# Allegro board PT8620_LTC_patch.brd
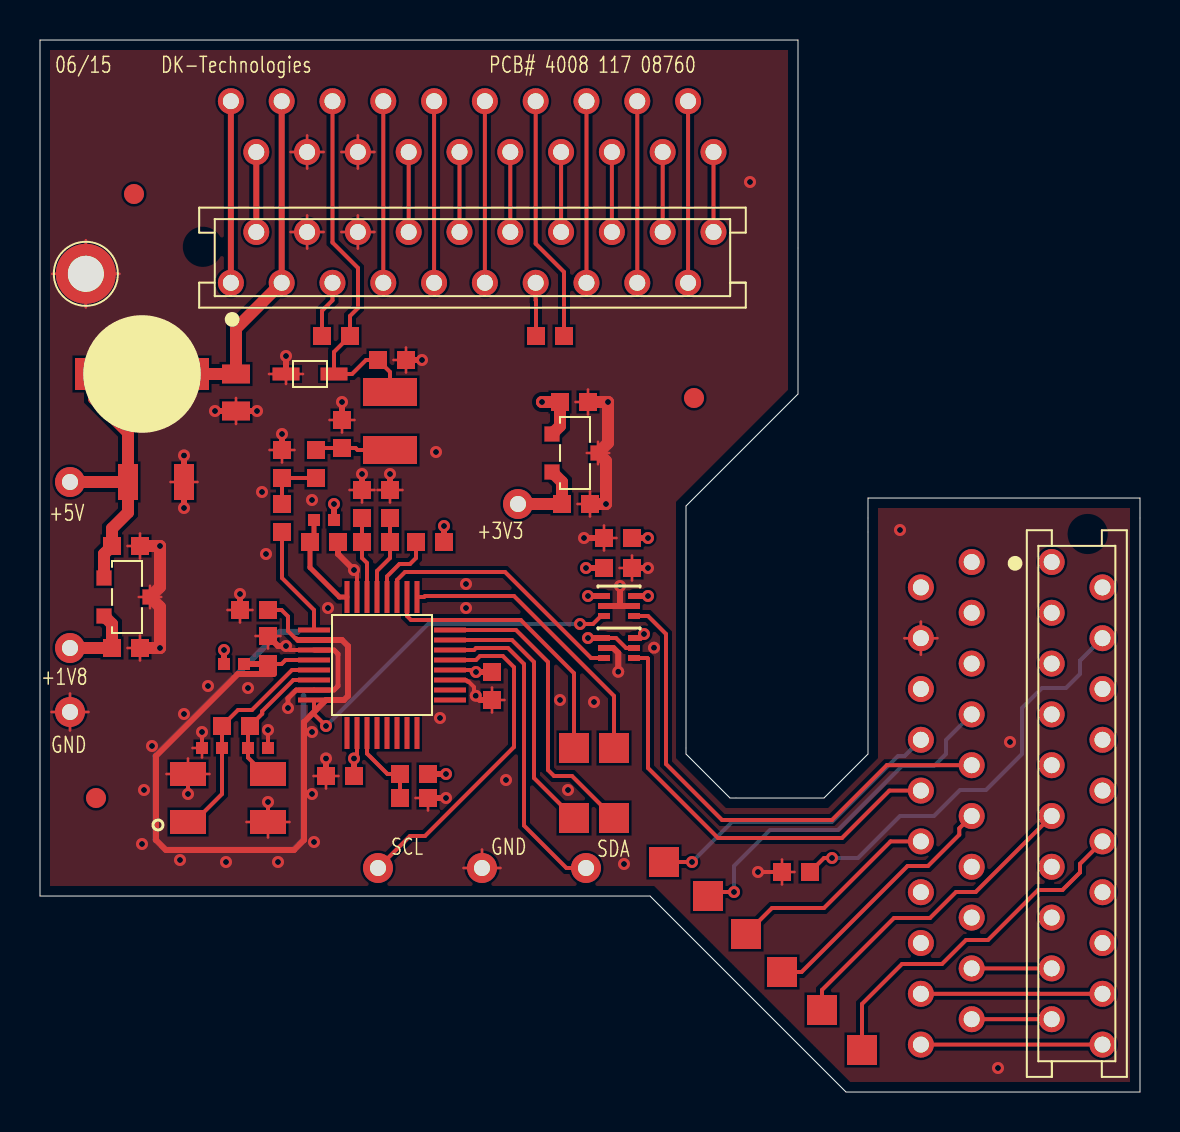
[diagram p0: board, top side]
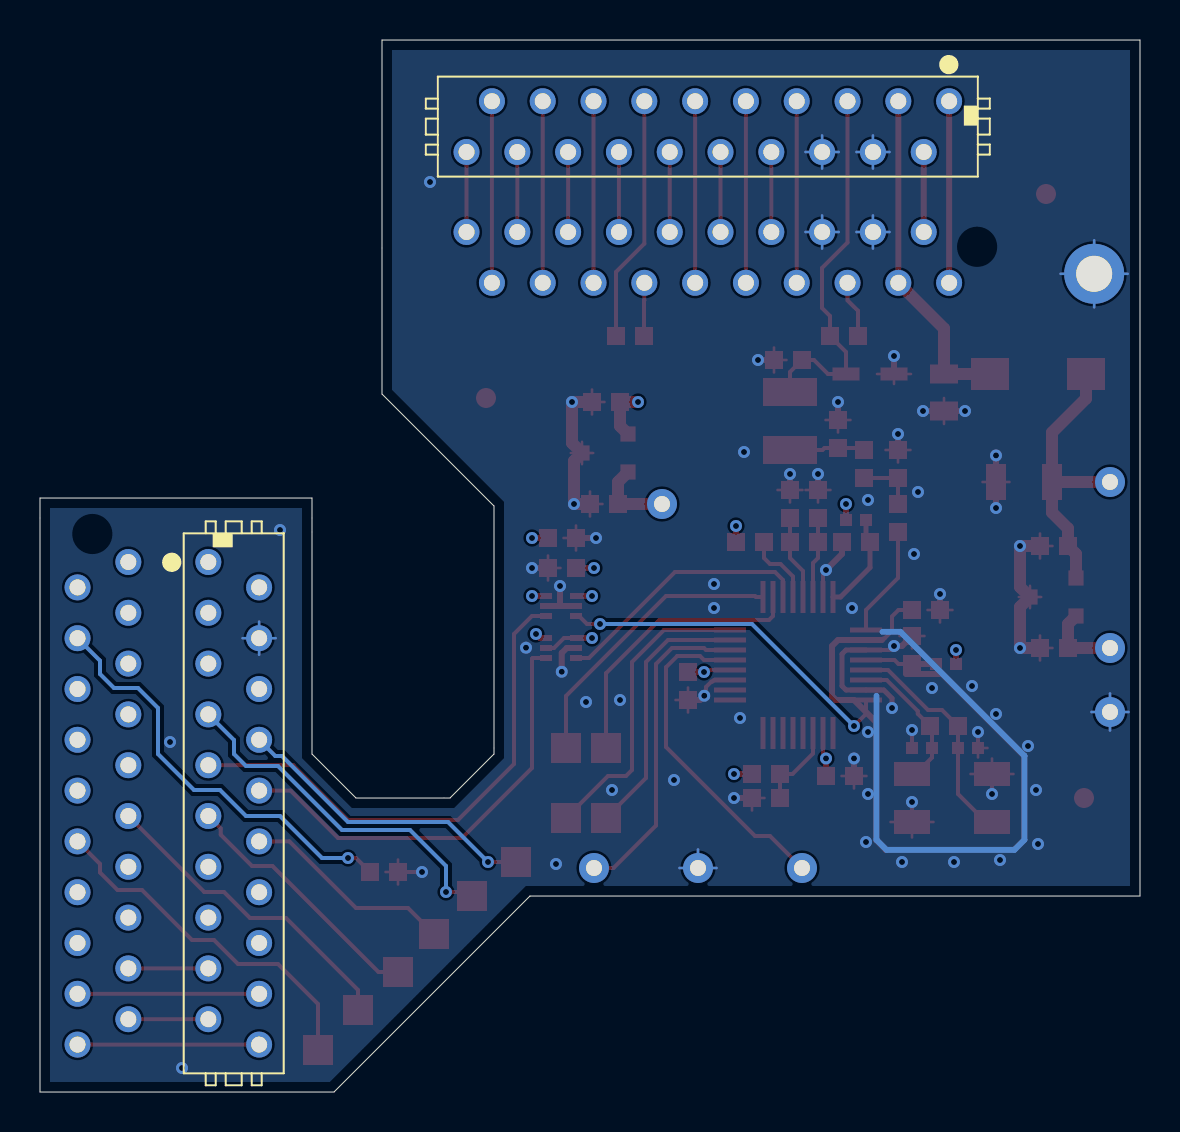
[diagram p1: board, bottom side, seen from below]

Outline 55 x 52.6 mm; copper layers: TOP, LAYER2, LAYER3, BOTTOM. Coordinates in mm from the lower left corner of the outline.
Outline path: 0,52.6 37.9,52.6 37.9,34.9 32.3,29.3 32.3,16.9 34.5,14.7 39.2,14.7 41.4,16.9 41.4,29.7 55,29.7 55,0 40.3,0 30.5,9.8 0,9.8 0,52.6

## Placement (name value [footprint] x y rotation side)
C1  1uF  [CC0603]  26.7 34.5 0 top
C2  1uF  [CC0603]  26.8 29.4 0 top
C3  1uF  [CC0603]  4.3 27.3 0 top
C4  1uF  [CC0603]  4.3 22.2 0 top
C5  10uF/25V  [CC1206]  5.8 30.5 0 top
C6  100nF  [CC0805]  9.8 34.98 270 top
C7  1uF  [CC0603]  16.1 29.4 270 top
C8  1uF  [CC0603]  17.5 29.4 270 top
C9  1uF  [CC0603]  16.8 27.5 0 top
C10  100nF  [CC0603]  12.1 28.7 270 top
C11  180pF  [CC0603]  17.6 36.6 0 top
C12  180pF  [CC0603]  15.1 32.9 90 top
C13  100nF  [CC0603]  10.7 24.1 0 top
C14  12pF  [CC0402]  8.6 17.2 180 top
C15  12pF  [CC0402]  10.9 17.2 0 top
C16  100nF  [CC0603]  11.4 22.1 90 top
C17  100nF  [CC0603]  14.2 27.5 0 top
C18  100nF  [CC0603]  22.6 20.3 270 top
C19  100nF  [CC0603]  15 15.8 180 top
C20  100nF  [CC0603]  28.9 26.2 0 top
C21  100nF  [CC0603]  28.9 27.7 180 top
D1  5V, TVS  [SOD323_TVS]  13.5 35.9 0 top
FID1  1mm  [FIDUCIAL1_3]  4.7 44.9 0 top
FID2  1mm  [FIDUCIAL1_3]  32.7 34.7 0 top
FID3  1mm  [FIDUCIAL1_3]  2.8 14.7 0 top
J1  TE_9-215464-0  [TE_215464]  21.61 48.27 180 bottom
J2  TE_9-215079-0  [TE_215079]  21.61 41.73 180 top
J3  TE_9-215464-0  [TE_215464]  45.31 14.44 90 bottom
J4  pad1.5x1.5mm  [PAD150X150]  34.9 9.8 0 top
J5  pad1.5x1.5mm  [PAD150X150]  32.7 11.5 0 top
J6  pad1.5x1.5mm  [PAD150X150]  38.6 6 0 top
J7  pad1.5x1.5mm  [PAD150X150]  36.8 7.9 0 top
J8  pad1.5x1.5mm  [PAD150X150]  28.2 17.2 0 top
J9  pad1.5x1.5mm  [PAD150X150]  30.2 17.2 0 top
J10  pad1.5x1.5mm  [PAD150X150]  30.2 13.7 0 top
J17  TE_9-215079-0  [TE_215079]  51.85 14.44 90 top
J18  pad1.5x1.5mm  [PAD150X150]  28.2 13.7 0 top
J19  pad1.5x1.5mm  [PAD150X150]  40.6 4.1 0 top
J20  pad1.5x1.5mm  [PAD150X150]  42.6 2.1 0 top
L1  2.7uH, 2.15A  [LQH55P_2220]  5.1 35.9 0 top
L2  2.7uH/0.29A  [CL1210]  17.5 33.55 270 top
L3  40R@100Mhz_0402  [CR0402]  14.2 28.6 180 top
L4  40R@100Mhz_0402  [CR0402]  9.7 21.4 0 top
PAD1  hole30p18  [HOLE30P18]  4.79 40.91 0 top
R1  N.M.  [CR0603]  14.8 37.8 0 top
R2  N.M.  [CR0603]  25.5 37.8 0 top
R3  0R  [CR0603]  19.5 27.5 0 top
R4  37R4_1pct  [CR0603]  13.8 31.4 270 top
R5  37R4_1pct  [CR0603]  12.1 31.4 270 top
R6  0R  [CR0603]  37.8 11 0 top
R7  100K_1pct  [CR0603]  9.8 18.3 0 top
R8  N.M.  [CR0603]  18.7 15.9 0 top
R9  10K0_1pct  [CR0603]  18.7 14.7 0 top
TP1  +5V  [TESTPOINT_PL080C150]  1.5 30.5 0 top
TP2  +3V3  [TESTPOINT_PL080C150]  23.9 29.4 0 top
TP3  +1V8  [TESTPOINT_PL080C150]  1.5 22.2 0 top
TP4  GND  [TESTPOINT_PL080C150]  1.5 19 0 top
TP5  GND  [TESTPOINT_PL080C150]  22.1 11.2 0 top
TP6  SCL  [TESTPOINT_PL080C150]  16.9 11.2 0 top
TP7  SDA  [TESTPOINT_PL080C150]  27.3 11.2 0 top
U1  AP7333, 3.3V  [SOT-23-123]  25.6 32.9 270 top
U2  AP7333, 1.8V  [SOT-23-123]  3.2 25.7 270 top
U3  SN74LVC1T45DRLR  [SOT533-6_DRL]  28.95 24.3 270 top
U4  SN74LVC1T45DRLR  [SOT533-6_DRL]  28.95 22.2 270 top
U5  TVP5150  [TQFP32_P050_700X700]  17.1 21.35 0 top
X1  QC5A14.31818F12B12  [XTAL_SMD4_P400_500X320]  9.4 14.7 0 top

## Library data of the parts
C1-C21 = KOND
D1 = TVS
FID1-FID3 = FID
J1-J3 J17 = CON20
J4-J10 J18-J20 = CON1_0: room: AESIN2
L1 = INDUCTOR
L2 = SPOLE
L3 L4 = RF_IND_1: room: ANALOG_AUDIO
PAD1 = PAD
R1-R9 = RES
TP1-TP7 = TEST POINT: room: POWER_3V3
U1 U2 = AP7333
U3 U4 = 74LVC1T45
U5 = TVP5150
X1 = XTAL_4S

## Footprints (pads in the part's own frame, mm; a bottom-side part is the same pattern mirrored in y, then rotated)
CC0402
  rect 0.6x0.6 smd: 1(-0.5,0) 2(0.5,0)
CC0603
  rect 0.9x0.9 smd: 1(-0.7,0) 2(0.7,0)
CC0805
  rect 0.95x1.4 smd: 1(-0.925,0) 2(0.925,0)
CC1206
  rect 1x1.8 smd: 1(-1.4,0) 2(1.4,0)
CL1210
  rect 1.4x2.7 smd: 1(-1.45,0) 2(1.45,0)
CR0402
  rect 0.6x0.6 smd: 1(-0.5,0) 2(0.5,0)
CR0603
  rect 0.9x0.9 smd: 1(-0.7,0) 2(0.7,0)
FIDUCIAL1_3
  round 1 smd: 1(0,0)
HOLE30P18
  round 3 hole 1.8: 1(-2.5,0)
LQH55P_2220
  rect 1.9x1.6 smd: 1(-2.4,0) 2(2.4,0)
PAD150X150
  rect 1.5x1.5 smd: 1(-1.5,0)
SOD323_TVS
  rect 1.35x0.65 smd: 1(-1.2,0) 2(1.2,0)
SOT533-6_DRL
  rect 0.3x0.6 smd: 1(-0.5,-0.75) 2(0,-0.75) 3(0.5,-0.75) 4(0.5,0.75) 5(0,0.75) 6(-0.5,0.75)
SOT-23-123
  rect 0.76x0.76 smd: 1(0,0) 2(1.9,0) 3(0.95,2.3)
TE_215079
  round 0 hole 1.6 unplated: (13.465,-0.53)
  round 1.3 hole 0.8: 1(12.065,1.27) 2(10.795,-1.27) 3(9.525,1.27) 4(8.255,-1.27) 5(6.985,1.27) 6(5.715,-1.27) 7(4.445,1.27) 8(3.175,-1.27) 9(1.905,1.27) 10(0.635,-1.27) 11(-0.635,1.27) 12(-1.905,-1.27) 13(-3.175,1.27) 14(-4.445,-1.27) 15(-5.715,1.27) 16(-6.985,-1.27) 17(-8.255,1.27) 18(-9.525,-1.27) 19(-10.795,1.27) 20(-12.065,-1.27)
TE_215464
  round 1.3 hole 0.8: 1(12.065,1.27) 2(10.795,-1.27) 3(9.525,1.27) 4(8.255,-1.27) 5(6.985,1.27) 6(5.715,-1.27) 7(4.445,1.27) 8(3.175,-1.27) 9(1.905,1.27) 10(0.635,-1.27) 11(-0.635,1.27) 12(-1.905,-1.27) 13(-3.175,1.27) 14(-4.445,-1.27) 15(-5.715,1.27) 16(-6.985,-1.27) 17(-8.255,1.27) 18(-9.525,-1.27) 19(-10.795,1.27) 20(-12.065,-1.27)
TESTPOINT_PL080C150
  round 1.5 hole 0.8: 1(0,0)
TQFP32_P050_700X700
  rect 1.6x0.25 smd: 1(-3.4,1.75) 2(-3.4,1.25) 3(-3.4,0.75) 4(-3.4,0.25) 5(-3.4,-0.25) 6(-3.4,-0.75) 7(-3.4,-1.25) 8(-3.4,-1.75) 17(3.4,-1.75) 18(3.4,-1.25) 19(3.4,-0.75) 20(3.4,-0.25) 21(3.4,0.25) 22(3.4,0.75) 23(3.4,1.25) 24(3.4,1.75)
  rect 0.25x1.6 smd: 9(-1.75,-3.4) 10(-1.25,-3.4) 11(-0.75,-3.4) 12(-0.25,-3.4) 13(0.25,-3.4) 14(0.75,-3.4) 15(1.25,-3.4) 16(1.75,-3.4) 25(1.75,3.4) 26(1.25,3.4) 27(0.75,3.4) 28(0.25,3.4) 29(-0.25,3.4) 30(-0.75,3.4) 31(-1.25,3.4) 32(-1.75,3.4)
XTAL_SMD4_P400_500X320
  rect 1.8x1.2 smd: 1(-2,-1.2) 2(2,-1.2) 3(2,1.2) 4(-2,1.2)

## Nets
+1V8: C4.1 L3.1 L4.1 TP3.1 U2.2(VO)
+3V3: C2.1 C18.1 C19.1 C20.1 R3.2 R8.2 TP2.1 U1.2(VO) U3.1(VCCA) U4.1(VCCA) U4.5(DIR) U5.10(IO_DVDD) U5.20(DVDD)
+5V: C1.1 C3.1 C5.1 C21.1 L1.1 TP1.1 U1.1(VI) U2.1(VI) U3.6(VCCB) U4.6(VCCB)
GND: C1.2 C2.2 C3.2 C4.2 C5.2 C6.2 C7.1 C8.1 C11.2 C12.2 C13.1 C14.2 C15.2 C16.2 C17.2 C18.2 C19.2 C20.2 C21.2 D1.1 J1.4 J1.6 J2.4 J2.6 J3.4 PAD1.1 R5.1 R6.1 R9.2 TP4.1 TP5.1 U1.3(GND) U2.3(GND) U3.2(GND) U3.5(DIR) U4.2(GND) U5.3(PLL_AGND) U5.7(AGND) U5.19(DGND) U5.31(CH_AGND) X1.2(GND1) X1.4(GND2)
CH_AVDD: C17.1 L3.2 U5.32(CH_AVDD)
CY_P3_4: J3.12 J7.1
CY_P3_5: J3.11 J6.1
CY_P3_6: J3.10 U4.4(B)
CY_P3_7: J3.9 U3.4(B)
CY_P12_0: J3.8 J5.1
CY_P12_1: J3.7 J4.1
DEC_INT: U4.3(A) U5.27(INTREQ/GPCL/VBLK)
DEC_RES: U3.3(A) U5.8(RESETB)
F4_M: J1.12 J2.12
F8_G: J1.11 J2.11
FF_G: J1.9 J2.9
FF_M: J1.10 J2.10
FH_G: J1.7 J2.7
FH_M: J1.8 J2.8
GEN_VIDEO: C11.1 D1.2 J1.5 L2.1 R1.2
GPS_GND: J17.4 R6.2
GPS_LOCK_STAT: J3.18 J17.18
GPS_PPS: J3.19 J17.19
GPS_REQ: J3.17 J17.17
GPS_TX: J3.20 J17.20
NMRES: J1.16 J2.16
PDN: R3.1 U5.28(PDN)
PLL_AVDD: C16.1 L4.2 U5.4(PLL_AVDD)
SCL: TP6.1 U5.21(SCL)
SCL1: J1.14 J2.14
SDA: TP7.1 U5.22(SDA)
SDA1: J1.15 J2.15
TCK: J1.19 J2.19
TCODECLK: J1.13 R2.2
TDI: J1.17 J2.17
TDO: J1.20 J2.20
TMS0: J1.18 J2.18
XK1+5V: C6.1 J1.3 J2.3 L1.2
XK1+12V: J1.2 J2.2
XK1-5V: J1.1 J2.1
N16744351: J2.13 R2.1
N16749112: C15.1 R7.2 U5.6(XTAL2) X1.3(X2)
N16749200: C14.1 R7.1 U5.5(XTAL1/OSC_IN) X1.1(X1)
N16749232: C13.2 U5.2(AIP1B)
N16749244: C10.2 U5.1(AIP1A)
N16749276: C10.1 R4.2 R5.2
N16749340: C12.1 L2.2 R4.1
N16749652: J18.1 U5.23(FID/GLCO)
N16749656: J10.1 U5.24(VSYNC/PALI)
N16749660: J9.1 U5.25(HSYNC)
N16749668: J8.1 U5.26(AVID)
N16749840: C8.2 C9.2 U5.29(REFP)
N16749852: C7.2 C9.1 U5.30(REFM)
N16749946: R8.1 R9.1 U5.11(YOUT7/I2CSEL)
N16751395: J2.5 R1.1
N16762570: J17.12 J20.1
N16762572: J17.11 J19.1

Pads without a net: FID1 1; FID2 1; FID3 1; J3 1 2 3 5 6 13 14 15 16; J17 1 2 3 5 6 7 8 9 10 13 14 15 16; U5 9 12 13 14 15 16 17 18

## Via types
v1: diameter 0.6, hole 0.3, TOP to BOTTOM, 78 vias

## Routing (per net, layer and track width the routed paths; a pad name or vN(x,y) marks a point on that pad's centre or on a via; arc(x,y) is an arc through that point)
+1V8: length 27.4
  TOP w0.3: L3.1 v1(14.7,29.4) ; L4.1 v1(9.2,22.1)
  TOP w0.6: U2.2 3.6,23.4 C4.1 TP3.1
  LAYER3 w0.127: 0.57,22.2 TP3.1 ; TP3.1 1.5,23.13 ; TP3.1 1.5,21.27 ; TP3.1 2.43,22.2
  LAYER3 w0.6: v1(14.7,29.4) 14.7,27.6 v1(9.2,22.1) 7.9,23.4 2.7,23.4 TP3.1
+3V3: length 47
  TOP w0.2: U4.5 29.3,22.2 28.8,22.7 U4.1 ; v1(21.8,21) 21.6,21 21.5,21.1 U5.20 ; U5.10 15.85,16.83 v1(15.7,16.68)
  TOP w0.3: C20.1 v1(27.3,26.2) ; R3.2 v1(20.2,28.3) ; U4.1 v1(27.4,22.7) ; C18.1 v1(21.8,21) ; C19.1 v1(15.7,16.68) ; U3.1 v1(27.4,24.8) ; R8.2 v1(20.3,15.9)
  TOP w0.6: TP2.1 C2.1 26.1,30.5 U1.2
  LAYER3 w0.127: TP2.1 24.83,29.4 ; TP2.1 23.9,28.47 ; TP2.1 23.9,30.33
  LAYER3 w0.6: v1(20.2,28.3) 21.3,29.4 TP2.1 24.73,28.57 24.93,28.57 v1(27.3,26.2) 27.3,24.9 v1(27.4,24.8) 28.05,24.15 28.05,23.3 27.45,22.7 v1(27.4,22.7) 25.7,21 v1(21.8,21) 21,20.2 21,20.16 20.99,20.14 20.99,16.59 v1(20.3,15.9) 19.52,16.68 v1(15.7,16.68)
+5V: length 65.6
  TOP w0.3: C21.1 v1(30.4,27.7) ; U3.6 v1(30.4,24.8) ; v1(30.2,22.9) 30,22.7 U4.6
  TOP w0.6: v1(25.1,34.5) C1.1 26,33.3 U1.1 ; U2.1 3.2,26.9 C3.1 3.6,28.18 4.4,28.98 C5.1 ; C5.1 4.4,32.97 2.7,34.67 L1.1 ; C5.1 TP1.1
  LAYER3 w0.127: 0.57,30.5 TP1.1 ; TP1.1 2.43,30.5 ; TP1.1 1.5,31.43 ; TP1.1 1.5,29.57
  LAYER3 w0.6: v1(25.1,34.5) 25.1,30.58 ; 25.1,30.58 23.58,32.1 20.6,32.1 20.6,32.33 20.13,32.8 19.47,32.8 19,32.33 19,32.1 8.06,32.1 7.53,32.63 6.87,32.63 6.34,32.1 3.1,32.1 TP1.1 ; 25.1,30.58 25.32,30.8 28.2,30.8 29.4,29.6 29.4,28.7 v1(30.4,27.7) 29.67,26.97 29.67,26.6 29.6,26.53 29.6,25.87 29.89,25.58 29.89,25.31 v1(30.4,24.8) 30.4,23.83 30.2,23.63 v1(30.2,22.9)
GND: length 218.5
  TOP w0.127: 28.2,27.07 C21.2 ; C21.2 28.83,27.7 ; C21.2 28.2,28.33 ; U2.3 5.5,25.31 ; U2.3 6.06,24.75 ; U2.3 4.94,24.75 ; U2.3 5.5,24.19 ; 16.87,30.1 C8.1 ; C8.1 17.5,29.47 ; C8.1 18.13,30.1 ; 15.47,30.1 C7.1 ; C7.1 16.73,30.1 ; C7.1 16.1,29.47 ; 5,26.67 C3.2 ; C3.2 4.37,27.3 ; C3.2 5,27.93 ; C2.2 27.5,30.03 ; C2.2 27.5,28.77 ; C2.2 26.87,29.4 ; 15.1,32.97 C12.2 ; C12.2 14.47,33.6 ; C12.2 15.73,33.6 ; 7.88,30.5 C5.2 6.52,30.5 ; R6.1 37.73,11 ; R6.1 37.1,11.63 ; R6.1 37.1,10.37 ; 27.9,31.39 U1.3 ; U1.3 28.46,31.95 ; U1.3 27.9,32.51 ; U1.3 27.34,31.95 ; 10.77,22.8 C16.2 ; C16.2 11.4,22.17 ; C16.2 12.03,22.8 ; 10.32,13.5 X1.2 ; X1.2 11.4,12.72 ; X1.2 12.48,13.5 ; 13.35,42.17 J2.4 ; J2.4 12.53,43 ; J2.4 14.18,43 ; J2.4 13.35,43.83 ; 5,21.57 C4.2 ; C4.2 5,22.83 ; C4.2 4.37,22.2 ; C19.2 14.93,15.8 ; C19.2 14.3,15.17 ; C19.2 13.67,15.8 ; X1.4 7.4,16.68 ; X1.4 6.32,15.9 ; X1.4 8.48,15.9 ; 2.29,39.23 PAD1.1 ; PAD1.1 0.61,40.91 ; PAD1.1 2.29,42.59 ; PAD1.1 3.97,40.91 ; C18.2 23.23,19.6 ; C18.2 22.6,20.23 ; C18.2 22.6,18.97 ; 9.8,34.7 C6.2 9.8,33.4 ; 29.6,25.57 C20.2 ; C20.2 29.6,26.83 ; C20.2 28.97,26.2 ; TP4.1 1.5,19.93 ; TP4.1 2.43,19 ; TP4.1 1.5,18.07 ; TP4.1 0.57,19 ; 7.62,17.2 C14.2 8.1,16.72 ; 43.22,22.69 J3.4 ; J3.4 44.04,21.86 ; J3.4 44.04,23.52 ; J3.4 44.87,22.69 ; 17.67,36.6 C11.2 ; C11.2 18.3,37.23 ; C11.2 18.3,35.97 ; 11.47,32.1 R5.1 ; R5.1 12.1,31.47 ; R5.1 12.73,32.1 ; TP5.1 23.03,11.2 ; TP5.1 21.17,11.2 ; TP5.1 22.1,12.13 ; 15.89,46.17 J1.6 ; J1.6 16.72,47 ; J1.6 15.07,47 ; J1.6 15.89,47.83 ; 19.4,14.07 R9.2 18.77,14.7 ; 12.53,47 J1.4 ; J1.4 14.18,47 ; J1.4 13.35,47.83 ; J1.4 13.35,46.17 ; 15.07,43 J2.6 ; J2.6 16.72,43 ; J2.6 15.89,43.83 ; J2.6 15.89,42.17 ; 11.45,35.9 D1.1 ; D1.1 13.15,35.9 ; D1.1 12.3,35.4 ; 10,23.47 C13.1 ; C13.1 10.63,24.1 ; C13.1 9.37,24.1 ; 26.77,34.5 C1.2 ; C1.2 27.4,33.87 ; C1.2 27.4,35.13
  TOP w0.2: U5.19 21.3,20.6 21.38,20.52 21.42,20.52 21.7,20.25 21.7,19.9 v1(21.79,19.81) ; X1.4 v1(7.4,14.9) ; v1(12.3,22.3) 12.5,22.1 U5.3 ; R6.1 v1(35.9,11) ; v1(15.7,26.1) 15.85,25.95 U5.31 ; X1.2 v1(11.4,14.5) ; C15.2 v1(11.4,18.1) ; C14.2 v1(8.1,18)
  TOP w0.25: U5.3 14.7,22.1 14.9,21.9 14.9,20.3 14.7,20.1 U5.7 12.82,20.1 12.4,19.68 v1(12.4,19.2)
  TOP w0.3: C20.2 v1(30.4,26.2) ; 29,24.3 U3.2 ; 29,24.3 U3.5 ; 29,24.3 v1(29,25.3) ; R5.1 v1(12.1,32.9) ; C16.2 11.9,22.3 v1(12.3,22.3) ; D1.1 v1(12.3,36.8) ; v1(21.79,19.81) 22,19.6 C18.2 ; C11.2 v1(19.1,36.6) ; C8.1 v1(17.5,30.9) ; v1(15.7,26.1) 14.9,26.9 C17.2 ; v1(8.75,34.05) C6.2 v1(10.85,34.05) ; v1(28.91,21.01) 28.91,21.95 28.66,22.2 U4.2 ; C13.1 v1(10,24.9) ; C7.1 v1(16.1,30.9) ; C19.2 v1(14.3,16.68) ; v1(7.2,31.83) C5.2 v1(7.2,29.2) ; C12.2 v1(15.1,34.5) ; R9.2 v1(20.3,14.7) ; C21.2 v1(27.2,27.7)
  TOP w0.6: C2.2 v1(28.3,29.4) 28.3,31.55 U1.3 28.4,32.45 v1(28.4,34.5) C1.2 ; C4.2 v1(6,22.2) 6,24.25 U2.3 6,25.25 v1(6,27.3) C3.2
  LAYER2 w0.127: PAD1.1 3.87,40.91 ; PAD1.1 2.29,42.49 ; PAD1.1 0.71,40.91 ; PAD1.1 2.29,39.33 ; J2.6 16.72,43 ; J2.6 15.07,43 ; J2.6 15.89,43.83 ; J2.6 15.89,42.17 ; 12.53,43 J2.4 ; J2.4 13.35,43.83 ; J2.4 13.35,42.17 ; J2.4 14.18,43 ; J3.4 44.87,22.69 ; J3.4 44.04,21.86 ; J3.4 43.22,22.69 ; J3.4 44.04,23.52 ; J1.4 13.35,47.83 ; J1.4 13.35,46.17 ; J1.4 12.53,47 ; J1.4 14.18,47 ; TP4.1 1.5,19.93 ; TP4.1 2.43,19 ; TP4.1 1.5,18.07 ; TP4.1 0.57,19 ; J1.6 16.72,47 ; J1.6 15.89,47.83 ; J1.6 15.89,46.17 ; J1.6 15.07,47 ; TP5.1 22.1,12.13 ; TP5.1 21.17,11.2 ; TP5.1 23.03,11.2
  LAYER3 w0.127: TP5.1 22.1,12.13 ; TP5.1 21.17,11.2 ; TP5.1 23.03,11.2 ; PAD1.1 3.87,40.91 ; PAD1.1 2.29,39.33 ; PAD1.1 0.71,40.91 ; PAD1.1 2.29,42.49 ; 0.57,19 TP4.1 ; TP4.1 1.5,19.93 ; TP4.1 2.43,19 ; TP4.1 1.5,18.07 ; J2.6 16.72,43 ; J2.6 15.89,43.83 ; J2.6 15.07,43 ; J2.6 15.89,42.17 ; J1.4 14.18,47 ; J1.4 12.53,47 ; J1.4 13.35,46.17 ; J1.4 13.35,47.83 ; 13.35,42.17 J2.4 ; J2.4 13.35,43.83 ; J2.4 14.18,43 ; J2.4 12.53,43 ; J3.4 44.87,22.69 ; J3.4 44.04,23.52 ; J3.4 44.04,21.86 ; J3.4 43.22,22.69 ; J1.6 16.72,47 ; J1.6 15.07,47 ; J1.6 15.89,47.83 ; J1.6 15.89,46.17
  BOTTOM w0.127: 1.5,18.07 TP4.1 ; TP4.1 1.5,19.93 ; TP4.1 0.57,19 ; TP4.1 2.43,19 ; TP5.1 23.03,11.2 ; TP5.1 21.17,11.2 ; TP5.1 22.1,12.13 ; 12.53,47 J1.4 ; J1.4 13.35,47.83 ; J1.4 13.35,46.17 ; J1.4 14.18,47 ; 43.22,22.69 J3.4 ; J3.4 44.04,23.52 ; J3.4 44.87,22.69 ; J3.4 44.04,21.86 ; 15.07,43 J2.6 ; J2.6 16.72,43 ; J2.6 15.89,43.83 ; J2.6 15.89,42.17 ; PAD1.1 2.29,42.59 ; PAD1.1 0.61,40.91 ; PAD1.1 3.97,40.91 ; PAD1.1 2.29,39.23 ; 15.89,46.17 J1.6 ; J1.6 16.72,47 ; J1.6 15.89,47.83 ; J1.6 15.07,47 ; 13.35,42.17 J2.4 ; J2.4 14.18,43 ; J2.4 13.35,43.83 ; J2.4 12.53,43
  vias: v1(5.1,12.4) v1(5.2,15.1) v1(5.6,17.3) v1(7,11.6) v1(7.2,18.9) v1(8.4,20.3) v1(9.3,11.5) v1(10.4,20.2) v1(11.1,30) v1(11.3,26.9) v1(11.9,11.5) v1(13.6,29.6) v1(13.6,18) v1(13.6,14.9) v1(13.7,12.5) v1(14.4,24.2) v1(19.8,32) v1(20,18.7) v1(21.3,25.4) v1(21.3,24.2) v1(23.3,15.6) v1(26,19.6) v1(26.4,15.1) v1(27.7,19.5) v1(29.2,11.4) v1(30.7,22.21) v1(35.5,45.5) v1(43,28.1) v1(47.9,1.2) v1(48.5,17.5)
CH_AVDD: length 4.9
  TOP w0.25: L3.2 13.7,27.7 C17.1 13.5,26.22 14.97,24.75 U5.32
CY_P3_4: length 10.7
  TOP w0.2: J3.12 42.53,12.53 39.2,9.2 36.6,9.2 J7.1
CY_P3_5: length 12.9
  TOP w0.2: J3.11 45.96,13.18 45.96,12.86 44.4,11.3 43.38,11.3 38.08,6 J6.1
CY_P3_6: length 22.3
  TOP w0.2: U4.4 30.37,21.7 30.4,21.67 30.4,16.2 33.9,12.7 40.1,12.7 42.47,15.07 J3.10
CY_P3_7: length 26.1
  TOP w0.2: J3.9 42.34,16.34 39.6,13.6 34.1,13.6 31.3,16.4 31.3,22.9 30.4,23.8 U3.4
CY_P12_0: length 15.4
  TOP w0.2: J5.1 v1(32.6,11.5)
  BOTTOM w0.2: v1(32.6,11.5) 34.6,13.5 39.6,13.5 42.9,16.8 43.23,16.8 J3.8
CY_P12_1: length 18.2
  TOP w0.2: J4.1 33.5,10 v1(34.7,10)
  BOTTOM w0.2: J3.7 45.3,17.6 45.3,16.9 44.7,16.3 43.1,16.3 39.9,13.1 36.5,13.1 34.7,11.3 v1(34.7,10)
DEC_INT: length 13.1
  TOP w0.2: U5.27 17.85,25.6 18.25,26 23.25,26 27.55,21.7 U4.3
DEC_RES: length 17.7
  TOP w0.2: v1(14.3,18.3) 13.7,18.9 U5.8 ; v1(27,23.4) 27.65,23.4 28.05,23.8 U3.3
  BOTTOM w0.2: v1(14.3,18.3) 19.4,23.4 v1(27,23.4)
F4_M: length 4
  TOP w0.2: J2.12 J1.12
F8_G: length 9.1
  TOP w0.2: J1.11 J2.11
FF_G: length 9.1
  TOP w0.2: J1.9 J2.9
FF_M: length 4
  TOP w0.2: J1.10 J2.10
FH_G: length 9.1
  TOP w0.2: J1.7 J2.7
FH_M: length 4
  TOP w0.2: J1.8 J2.8
GEN_VIDEO: length 19
  TOP w0.2: J1.5 14.62,42.48 15.9,41.2 15.9,39.2 15.5,38.8 R1.2 14.7,37 D1.2 15.6,35.9 16.3,36.6 C11.1 17.5,36 L2.1
GPS_GND: length 21.2
  TOP w0.2: R6.2 39.2,11.7 v1(39.6,11.7)
  BOTTOM w0.2: J17.4 52,21.57 52,20.9 51.3,20.2 50.1,20.2 49.1,19.2 49.1,16.9 47.3,15.1 46,15.1 44.7,13.8 43,13.8 40.9,11.7 v1(39.6,11.7)
GPS_LOCK_STAT: length 9.1
  TOP w0.2: J3.18 J17.18
GPS_PPS: length 4
  TOP w0.2: J17.19 J3.19
GPS_REQ: length 4
  TOP w0.2: J3.17 J17.17
GPS_TX: length 9.1
  TOP w0.2: J3.20 J17.20
NMRES: length 4
  TOP w0.2: J1.16 J2.16
PDN: length 3.7
  TOP w0.2: R3.1 18.8,26.7 18.5,26.4 17.97,26.4 17.35,25.78 U5.28
PLL_AVDD: length 3.6
  TOP w0.2: U5.4 12.28,21.6 12.08,21.4 C16.1
  TOP w0.3: L4.2 C16.1
SCL: length 16.8
  TOP w0.2: U5.21 21.8,21.6 22,21.8 23.14,21.8 23.7,21.24 23.7,17.25 19.25,12.8 18.5,12.8 TP6.1
SCL1: length 4
  TOP w0.2: J1.14 J2.14
SDA: length 16.1
  TOP w0.2: TP7.1 26.32,11.2 24.2,13.32 24.2,21.4 23.4,22.2 21.8,22.2 21.7,22.1 U5.22
SDA1: length 9.1
  TOP w0.2: J2.15 J1.15
TCK: length 9.1
  TOP w0.2: J2.19 J1.19
TCODECLK: length 12.3
  TOP w0.2: R2.2 26.2,41 24.78,42.42 J1.13
TDI: length 9.1
  TOP w0.2: J1.17 J2.17
TDO: length 4
  TOP w0.2: J1.20 J2.20
TMS0: length 4
  TOP w0.2: J1.18 J2.18
XK1+5V: length 16.9
  TOP w0.3: J1.3 J2.3
  TOP w0.6: J2.3 9.8,38.18 C6.1 L1.2
XK1+12V: length 4
  TOP w0.3: J1.2 J2.2
XK1-5V: length 9.1
  TOP w0.3: J1.1 J2.1
N16744351: length 2.7
  TOP w0.2: J2.13 24.78,39.58 24.8,39.57 R2.1
N16749112: length 7.2
  TOP w0.2: U5.6 12.67,20.6 11.11,19.04 11.11,18.91 R7.2 10.4,18.2 C15.1 10.4,16.72 11.22,15.9 X1.3
N16749200: length 11.4
  TOP w0.2: U5.5 12.6,21.1 10.6,19.1 9.9,19.1 R7.1 C14.1 9.1,14.9 7.7,13.5 X1.1
N16749232: length 3.3
  TOP w0.2: U5.2 12.9,22.6 12.82,22.68 12.78,22.68 12.4,23.05 12.4,23.78 12.08,24.1 C13.2
N16749244: length 5.6
  TOP w0.2: C10.2 12.1,25.7 13.7,24.1 U5.1
N16749276: length 3
  TOP w0.2: R4.2 R5.2 C10.1
N16749340: length 3.8
  TOP w0.2: R4.1 13.9,32.2 C12.1 15.78,32.2 15.88,32.1 L2.2
N16749652: length 13.3
  TOP w0.2: J18.1 24.7,15.7 24.7,21.5 23.6,22.6 U5.23
N16749656: length 15.3
  TOP w0.2: U5.24 23.8,23.1 25.4,21.5 25.4,16.1 25.7,15.8 26.6,15.8 J10.1
N16749660: length 14.5
  TOP w0.2: U5.25 19.2,24.75 19.25,24.8 23.7,24.8 28.7,19.8 J9.1
N16749668: length 14.2
  TOP w0.2: J8.1 26.7,20.94 24.04,23.6 18.55,23.6 18.35,23.8 U5.26
N16749840: length 4.2
  TOP w0.2: U5.29 16.85,26.05 17.5,26.7 C9.2 C8.2
N16749852: length 4.1
  TOP w0.2: C7.2 C9.1 16.1,26.7 16.35,26.45 U5.30
N16749946: length 4.3
  TOP w0.2: U5.11 16.35,16.92 17.37,15.9 R8.1 R9.1
N16751395: length 2.9
  TOP w0.2: J2.5 14.62,39.58 14.1,39.06 R1.1
N16762570: length 17.9
  TOP w0.2: J20.1 41.1,4.4 43.1,6.4 45.1,6.4 46.3,7.6 47.4,7.6 49.9,10.1 51.12,10.1 52,10.98 52,11.41 J17.12
N16762572: length 16.1
  TOP w0.2: J17.11 46.78,10 45.8,10 44.5,8.7 42.7,8.7 39.1,5.1 J19.1

## Copper pours and planes (outline as drawn; the poured copper is in the pictures)
+1V8 on LAYER3: 0.5,21 0.5,23 2.5,25 9.2,25 14.4,30.2 15.7,30.2 15.8,30.1 15.8,27.9 8.9,21
+3V3 on LAYER3: 15.4,16.1 19,16.1 19.8,15.3 21,15.3 28.9,23.2 28.9,25.9 24.2,30.6 21.1,30.6 14.9,24.4 14.9,16.6
+5V on LAYER3: 29.5,22.2 29.1,22.6 29.1,25.9 23.4,31.6 4.2,31.6 1.8,29.2 0.5,29.2 0.5,31.7 2.4,33.6 23.2,33.6 24.7,35.1 25.9,35.1 31.1,29.9 31.1,22.7 30.6,22.2
GND on TOP: 40.51,0.5 30.71,10.3 0.5,10.3 0.5,52.1 37.4,52.1 37.4,35.11 31.8,29.51 31.8,16.69 34.29,14.2 39.41,14.2 41.9,16.69 41.9,29.2 54.5,29.2 54.5,0.5 ; 1 cut-out
GND on BOTTOM: 40.51,0.5 30.71,10.3 0.5,10.3 0.5,52.1 37.4,52.1 37.4,35.11 31.8,29.51 31.8,16.69 34.29,14.2 39.41,14.2 41.9,16.69 41.9,29.2 54.5,29.2 54.5,0.5 ; 1 cut-out
GND on LAYER2: 40.51,0.5 30.71,10.3 0.5,10.3 0.5,52.1 37.4,52.1 37.4,35.11 31.8,29.51 31.8,16.69 34.29,14.2 39.41,14.2 41.9,16.69 41.9,29.2 54.5,29.2 54.5,0.5 ; 3 cut-outs
GND on LAYER3: 40.51,0.5 30.71,10.3 0.5,10.3 0.5,52.1 37.4,52.1 37.4,35.11 31.8,29.51 31.8,16.69 34.29,14.2 39.41,14.2 41.9,16.69 41.9,29.2 54.5,29.2 54.5,0.5 ; 1 cut-out

## Text on the board
Ref Des/Silkscreen Top: +1V8 | +5V | GND | 06/15 | DK-Technologies | SCL | +3V3 | PCB# 4008 117 08760 | SDA
